# Altium PCB 8586S1.PcbDoc (part 1 of 2)
Units mm, origin at the board's own origin, x right, y up, seen from the top; angles counter-clockwise.
Board outline 80 x 108 mm, 2 copper layers (Top Layer, Bottom Layer); 127 components, 88 nets, 363 pads, 92 vias.
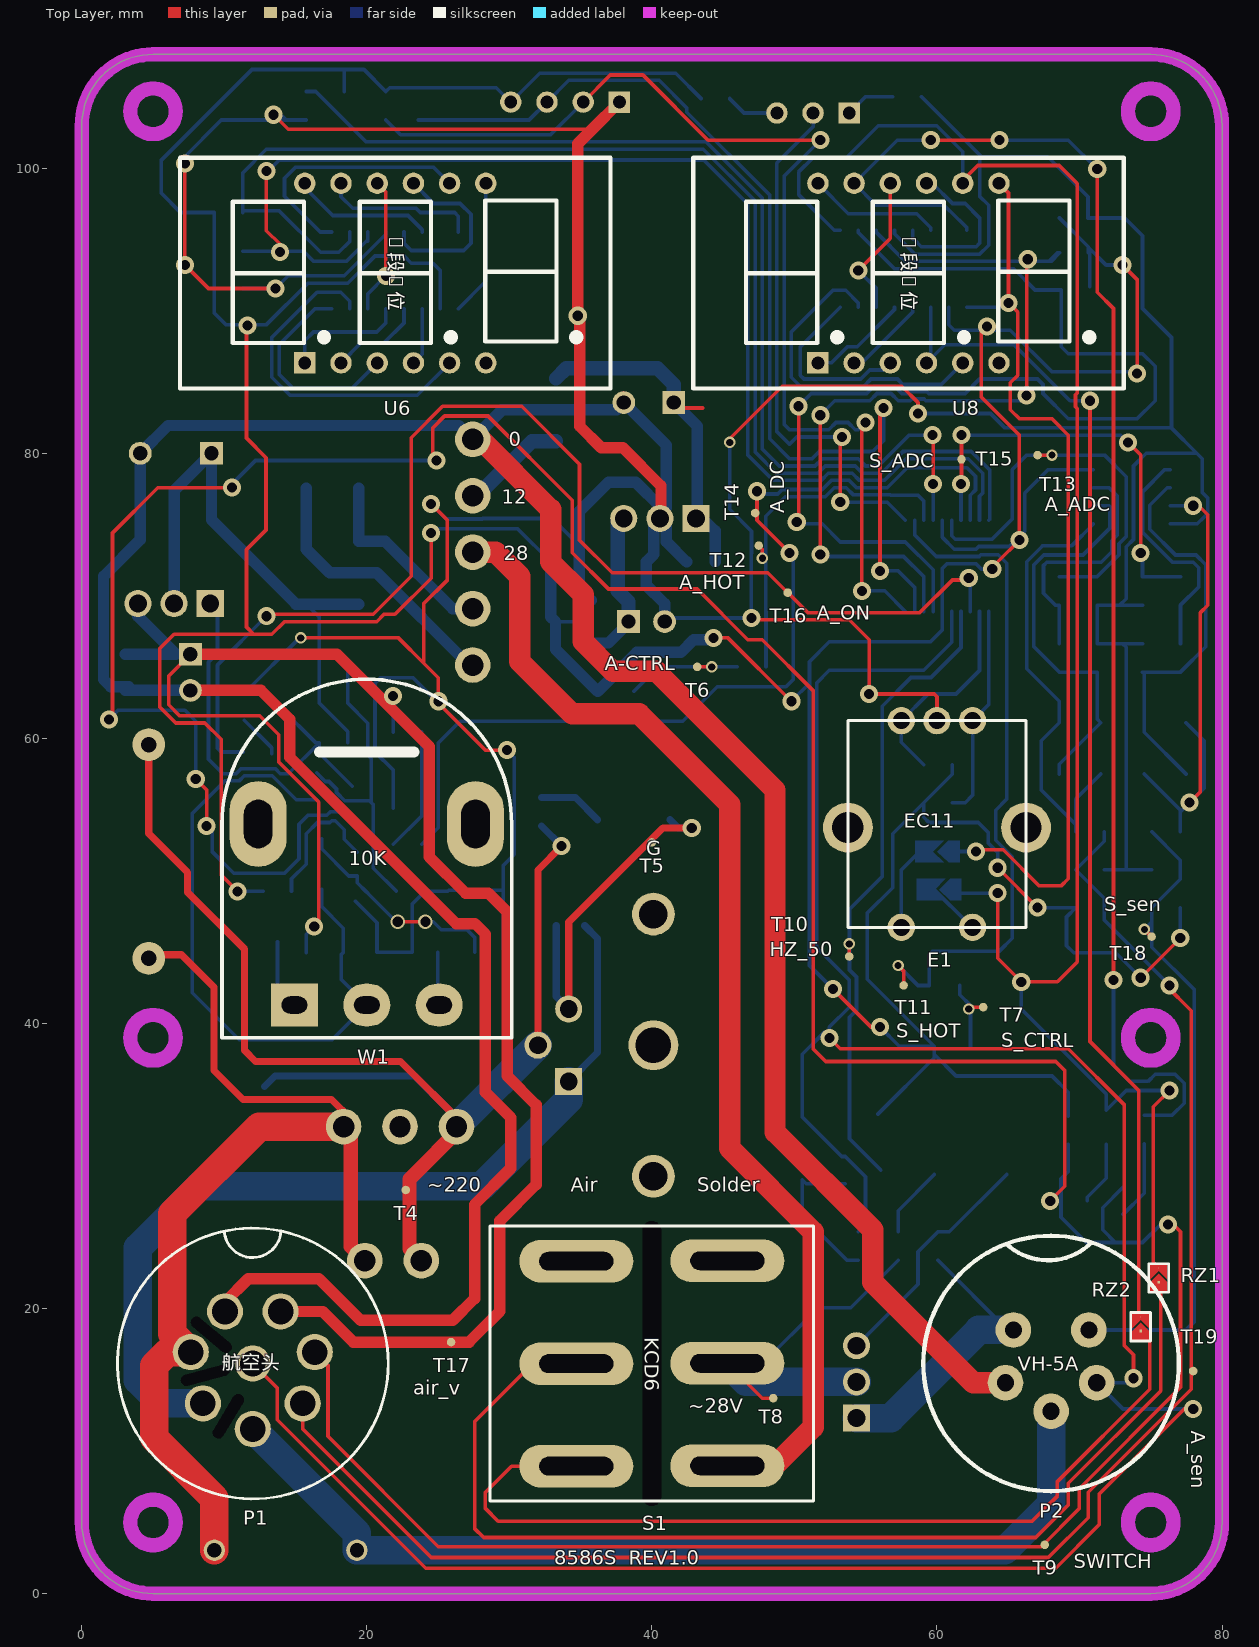
[diagram p0: Top Layer view]
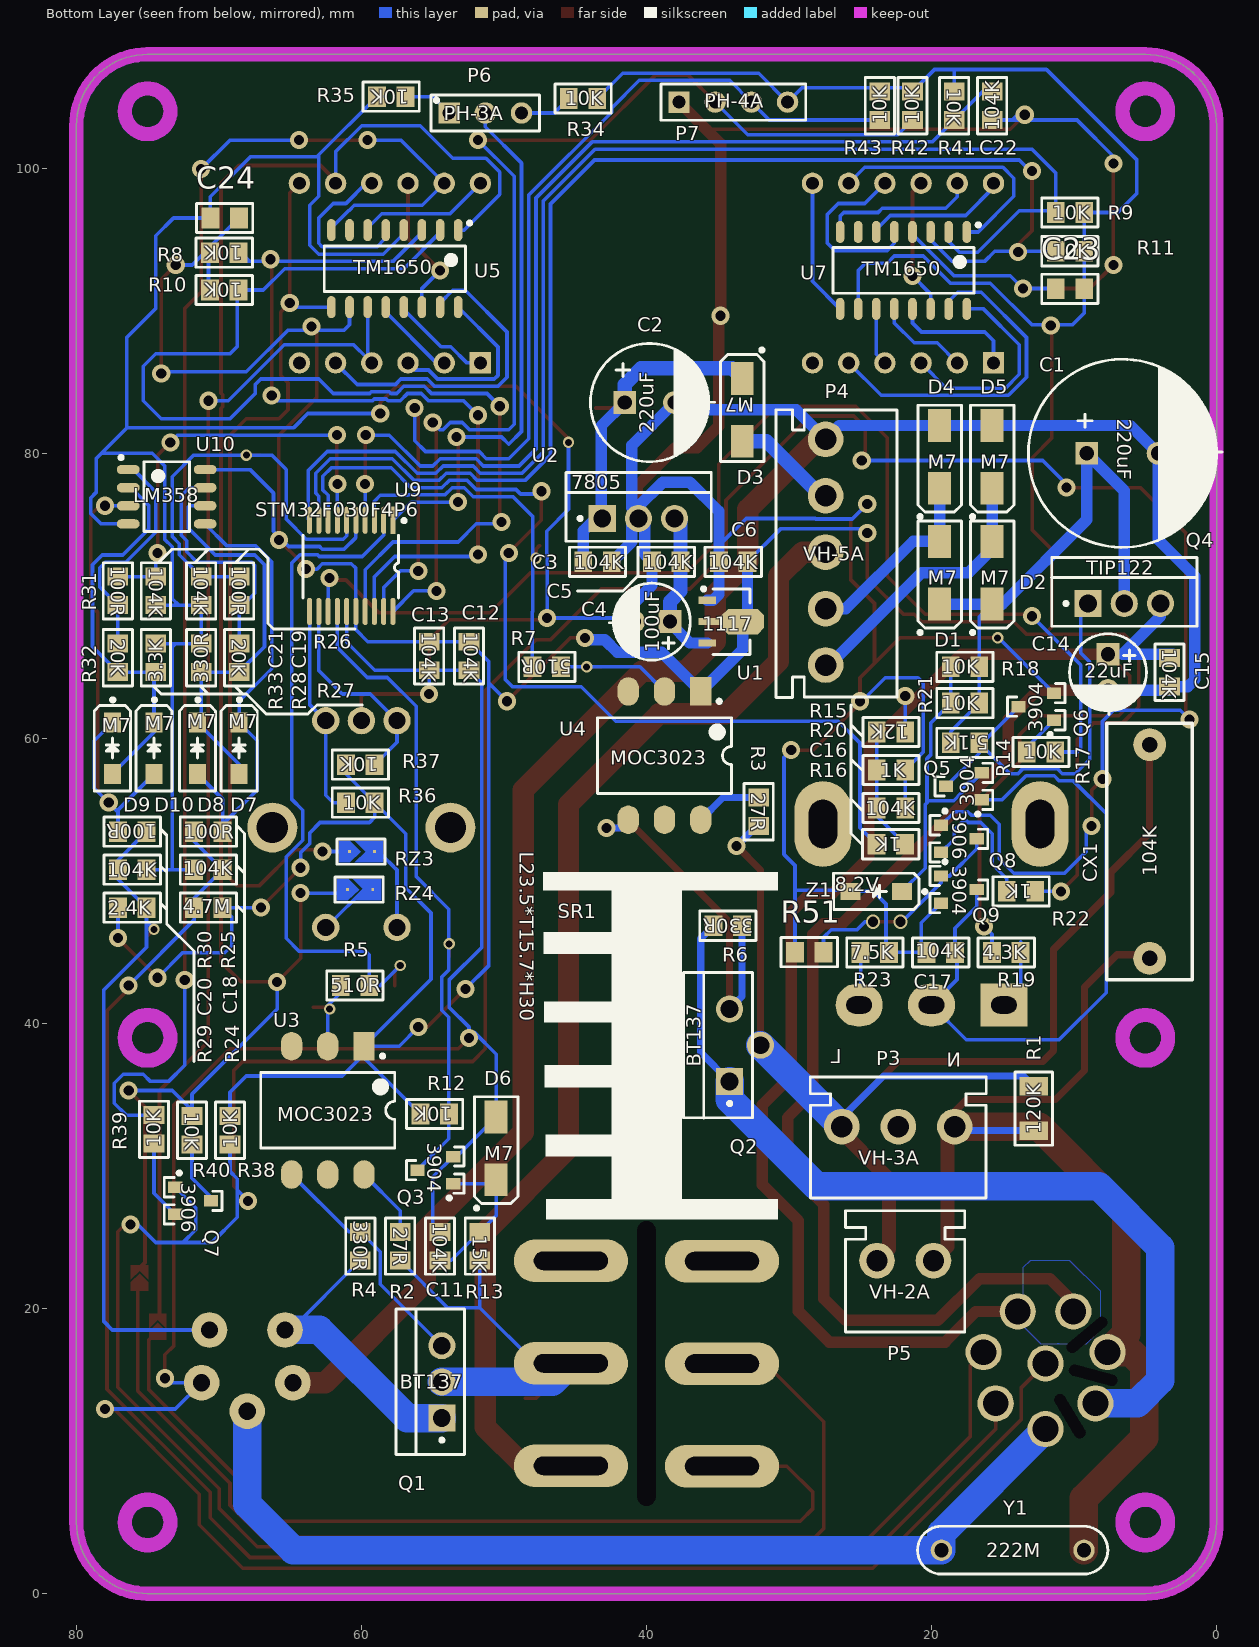
[diagram p1: Bottom Layer view, seen from below]
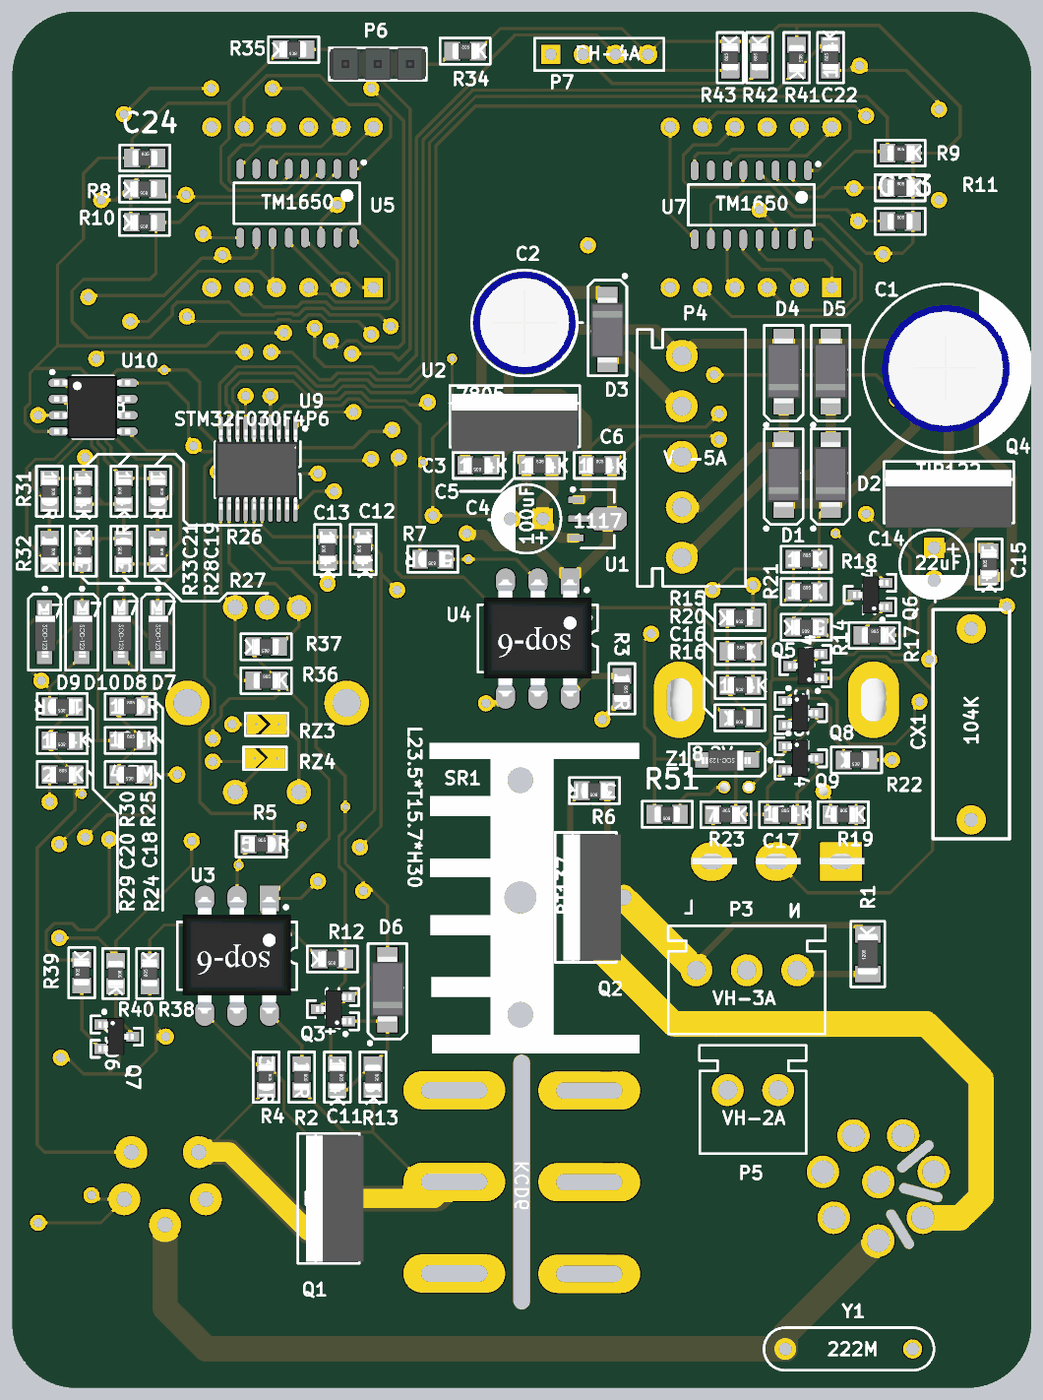
[diagram p3: 3D render of the assembled board from below, using the file's embedded part models]

## Layer stack, top to bottom
Top Solder: solder mask 0.0102, Solder Resist, Dk 3.5
Top Layer: signal copper 0.0356
Dielectric 1: dielectric 0.32, FR-4, Dk 4.8
Bottom Layer: signal copper 0.0356
Bottom Solder: solder mask 0.0102, Solder Resist, Dk 3.5

## Board outline
0,5 0,103 cw(c5,103) 5,108 75,108 cw(c75,103) 80,103 80,5 cw(c75,5) 75,0 5,0 cw(c5,5)

## Design rules (kind name [scope] priority, off if disabled: settings)
Clearance Clearance_1 [All] p1: gap=0.254
Clearance Plon [InPolygon] p2: gap=1
HoleSize [All] p1: absolutevalues=TRUE maxlimit=30 minlimit=0.025 maxpercent=80.000 minpercent=20.000
PolygonConnect [All] p1: connectstyle=Relief reliefconductorwidth=0.254 reliefentries=4 polygonreliefangle="90 Angle" airgapwidth=0.254
RoutingVias [All] p1: holewidth=0.711 width=0.8 viastyle="Through Hole" minholewidth=0.2 minwidth=0.2 maxholewidth=0.711 maxwidth=2
SolderMaskExpansion [All] p1: expansion=0.102
Width Width_1 [All] p1: maxlimit=2 minlimit=0.254 preferedwidth=0.254
29 further rules are at their usual default settings.

## Components (designator, comment, footprint, x,y, rotation, side; value= is the part's Value field where it differs from the comment)
C1 "220uF" P5D13H27 6.604,80.01 r180 bottom
C2 "220uF" P3.5D8H13 41.529,83.566 r180 bottom
C3 "104K" 0805 43.434,72.39 r0 bottom
C4 "100uF" P2.54D5H11 38.354,68.199 r0 bottom
C5 "104K" 0805 38.608,72.39 r180 bottom
C6 "104K" 0805 33.909,72.39 r180 bottom
C11 "104K" 0805 54.483,24.384 r270 bottom
C12 "104K" 0805 52.451,65.786 r90 bottom
C13 "104K" 0805 55.245,65.786 r90 bottom
C14 "22uF" P2.54D5H11 7.62,65.913 r270 bottom
C15 "104K" 0805 3.302,64.643 r90 bottom
C16 "104K" 0805 22.844,55.118 r0 bottom
C17 "104K" 0805 19.355,44.983 r180 bottom
C18 "104K" 0805 70.739,50.8 r180 bottom
C19 "104K" 0805 71.247,70.358 r90 bottom
C20 "104K" 0805 76.073,50.8 r0 bottom
C21 "104K" 0805 74.422,70.358 r90 bottom
C22 "104K" 0805 15.748,104.394 r90 bottom
C23 "10uF" 0805 10.287,91.542 r180 bottom
C24 "10uF" 0805 69.596,96.52 r180 bottom
CX1 "104K" 方形P15T6L18H12 4.699,52.07 r90 bottom
D1 "M7" SMA 19.431,71.628 r90 bottom
D2 "M7" SMA 15.748,71.628 r90 bottom
D3 "M7" SMA 33.274,83.058 r270 bottom
D4 "M7" SMA 19.431,79.756 r90 bottom
D5 "M7" SMA 15.748,79.756 r90 bottom
D6 "M7" SMA 50.546,31.242 r90 bottom
D7 "M7" SOD123 68.58,59.309 r90 bottom
D8 "M7" SOD123 71.501,59.309 r90 bottom
D9 "M7" SOD123 77.47,59.309 r90 bottom
D10 "M7" SOD123 74.549,59.309 r90 bottom
E1 "EC11" EC11 60,54 r180 top locked
P1 "航空头" 航空头8PIN 12,16.15 r0 top locked
P2 "VH-5A" 航空头5PIN 68.008,16.15 r0 top locked
P3 "VH-3A" CON3-P3.96 26.289,32.766 r270 bottom
P4 "VH-5A" CON5-P3.96 27.432,65.151 r180 bottom
P5 "VH-2A" CON2-P3.96 21.844,23.368 r270 bottom
P6 "PH-3A" CON3-P2.54 53.848,103.886 r180 bottom
P7 "PH-4A" CON4-P2.54 37.719,104.648 r180 bottom
Q1 "BT137" TO-220-3L-P2.54#1 54.356,14.859 r90 bottom
Q2 "BT137" TO-220-3L-P2.54#2 34.163,38.481 r90 bottom
Q3 "3904" SOT-23-3L 54.864,29.718 r90 bottom
Q4 "TIP122" TO-220-3L-P2.54#1 6.477,69.469 r180 bottom
Q5 "3904" SOT-23-3L 17.78,56.642 r90 bottom
Q6 "3904" SOT-23-3L 12.7,62.23 r90 bottom
Q7 "3906" SOT-23-3L 71.755,27.559 r270 bottom
Q8 "3906" SOT-23-3L 18.034,52.959 r270 bottom
Q9 "3904" SOT-23-3L 18.034,49.403 r270 bottom
R1 "120K" 1206 12.827,34.036 r90 bottom
R2 "27R" 0805 57.277,24.384 r270 bottom
R3 "27R" 0805 32.131,54.864 r270 bottom
R4 "330R" 0805 60.071,24.384 r270 bottom
R5 "510R" 0805 60.452,42.672 r180 bottom
R6 "330R" 0805 34.29,46.863 r0 bottom
R7 "510R" 0805 46.99,65.024 r0 bottom
R8 "10K" 0805 69.621,94.082 r0 bottom
R9 "10K" 0805 10.287,96.901 r180 bottom
R10 "10K" 0805 69.621,91.465 r0 bottom
R11 "10K" 0805 10.287,94.183 r180 bottom
R12 "10K" 0805 54.864,33.655 r0 bottom
R13 "15K" 0805 51.689,24.384 r270 bottom
R14 "5.1K" 0805 17.653,59.69 r0 bottom
R15 "12K" 0805 22.844,60.452 r0 bottom
R16 "1K" 0805 22.86,52.578 r0 bottom
R17 "10K" 0805 12.319,59.055 r180 bottom
R18 "10K" 0805 17.653,65.024 r180 bottom
R19 "4.3K" 0805 14.757,44.983 r180 bottom
R20 "1K" 0805 22.844,57.785 r180 bottom
R21 "10K" 0805 17.653,62.484 r180 bottom
R22 "1K" 0805 13.716,49.276 r0 bottom
R23 "7.5K" 0805 23.978,44.983 r180 bottom
R24 "4.7M" 0805 70.739,48.133 r0 bottom
R25 "100R" 0805 70.739,53.467 r180 bottom
R26 "100R" 0805 68.58,70.358 r270 bottom
R27 "20K" 0805 68.58,65.659 r270 bottom
R28 "330R" 0805 71.247,65.659 r90 bottom
R29 "2.4K" 0805 76.073,48.133 r180 bottom
R30 "100R" 0805 76.073,53.467 r0 bottom
R31 "100R" 0805 77.089,70.358 r270 bottom
R32 "20K" 0805 77.089,65.659 r270 bottom
R33 "3.3K" 0805 74.422,65.659 r90 bottom
R34 "10K" 0805 44.45,104.902 r180 bottom
R35 "10K" 0805 57.912,105.029 r0 bottom
R36 "10K" 0805 60.071,55.499 r180 bottom
R37 "10K" 0805 60.071,58.166 r0 bottom
R38 "10K" 0805 69.215,32.512 r90 bottom
R39 "10K" 0805 74.549,32.578 r90 bottom
R40 "10K" 0805 71.882,32.512 r270 bottom
R41 "10K" 0805 18.415,104.394 r270 bottom
R42 "10K" 0805 21.336,104.394 r90 bottom
R43 "10K" 0805 23.622,104.394 r90 bottom
R51 "10K" 0805 28.575,45.009 r0 bottom
RZ1 "" 跳线-小 75.565,22.352 r90 top
RZ2 "" 跳线-小 74.295,18.923 r90 top
RZ3 "" 跳线2012 59.944,52.07 r180 bottom
RZ4 "" 跳线2012 60.071,49.403 r180 bottom
S1 "KCD6" "开关-船式 - 双" 39.999,16.15 r0 top locked
SR1 "L23.5*T15.7*H30" 散热片L23.5*T15.7*H30 38.608,38.481 r90 bottom
T4 "~220" test_dot_6 22.733,28.321 r0 top
T5 "G" test_dot_6 40.005,52.705 r0 top
T6 "A-CTRL" test_dot_6 43.18,65.024 r0 top
T7 "S_CTRL" test_dot_6 63.246,41.148 r0 top
T8 "~28V" test_dot_6 48.514,13.716 r0 top
T9 "SWITCH" test_dot_6 67.564,3.429 r0 top
T10 "HZ_50" test_dot_6 53.848,44.704 r90 top
T11 "S_HOT" test_dot_6 57.658,42.672 r90 top
T12 "A_HOT" test_dot_6 47.498,73.533 r90 top
T13 "A_ADC" test_dot_6 67.056,79.883 r90 top
T14 "A_DC" test_dot_6 47.244,75.819 r90 top
T15 "S_ADC" test_dot_6 61.722,79.584 r90 top
T16 "A_ON" test_dot_6 49.53,70.231 r90 top
T17 "air_v" test_dot_6 25.908,17.653 r90 top
T18 "S_sen" test_dot_6 75.057,46.101 r90 top
T19 "A_sen" test_dot_6 77.978,15.621 r90 top
U1 "1117" SOT89L 34.036,68.199 r180 bottom
U2 "7805" TO-220-3L-P2.54#3 43.104,75.438 r180 bottom
U3 "MOC3023" SOP-6 62.357,33.909 r270 bottom
U4 "MOC3023" SOP-6 38.735,58.801 r270 bottom
U5 "TM1650" SOIC16_39MM 57.658,92.964 r270 bottom
U6 "8段3位" 数码管 22,92.65 r0 top locked
U7 "TM1650" SOIC16_39MM 21.971,92.837 r270 bottom
U8 "8段3位" 数码管 58,92.65 r0 top locked
U9 "STM32F030F4P6" TSSOP20引脚加长 57.785,75.311 r270 bottom
U10 "LM358" SOIC8_39MM 73.66,76.962 r180 bottom
W1 "10K" R16P5.083PIN 20,54 r0 top locked
Y1 "222M" 椭圆T3.3P10 19.304,3.048 r180 bottom
Z1 "8.2V" SOD123 23.876,49.276 r180 bottom

## Footprints (in the part's own frame and the unit in brackets; to place one, negate y for a bottom-side part, rotate by r counter-clockwise, add the part's x,y. Pads: shape width x height; smd on the part's side, far side on the other; paste and mask are expansions set on the pad)
0805 [mm] "Chip Resistor, Body 2.0x1.2mm, IPC Low Density"
  rect 1.25x1.45 smd: 1(-1,0) 2(1,0)
  silkscreen extent -1.97,-1.02 1.97,1.02, body extent -1,-0.63 1,0.63, height 0.78
1206 [mm] "Chip Resistor, Body 3.1x1.6mm, IPC High Density"
  rect 1.3x2 smd: 1(-1.55,0) 2(1.55,0)
  silkscreen extent -2.58,-1.33 2.58,1.33, body extent -1.6,-0.8 1.6,0.8, height 1
CON2-P3.96 [mm]
  round 2.5 hole 1.5: 1(0,-1.98) 2(0,1.98)
  silkscreen extent -3.5,-4.19 5,4.18
CON3-P2.54 [mm] "Connector; Header; 3 Position"
  rect 1.5x1.5 hole 0.9: 1(0,0)
  round 1.5 hole 0.9: 2(2.54,0) 3(5.08,0)
  silkscreen extent -1.27,-1.27 6.35,1.27, body extent -1.27,-1.27 6.35,1.27, height 9.5
CON3-P3.96 [mm]
  round 2.5 hole 1.5: 1(0,0) 2(0,3.96) 3(0,7.92)
  silkscreen extent -3.49,-2.21 5,10.13
CON4-P2.54 [mm] "Connector; Header; 4 Position"
  rect 1.5x1.5 hole 0.9: 1(0,0)
  round 1.5 hole 0.9: 2(2.54,0) 3(5.08,0) 4(7.62,0)
  silkscreen extent -1.27,-1.27 8.89,1.27
CON5-P3.96 [mm]
  round 2.5 hole 1.5: 1(0,0) 2(0,3.96) 3(0,7.92) 4(0,11.88) 5(0,15.84)
  silkscreen extent -3.49,-2.27 5,17.91
EC11 [mm]
  round 1.92 hole 1.2: 1(-2.5,-7.25) 2(2.5,-7.25) 3(0,-7.25) 4(-2.5,7.25) 5(2.5,7.25)
  round 3.5 hole 2.2: ""(-6.25,0.25) ""(6.25,0.25)
  silkscreen extent -6.25,-7.25 6.25,7.25
P2.54D5H11 [mm] "居中；引脚间距2.54直径5.4"
  rect 1.6x1.6 hole 1: 1(0,0)
  round 1.6 hole 1: 2(2.54,0)
  silkscreen extent -1.43,-2.7 4.24,2.7
P3.5D8H13 [mm]
  rect 1.6x1.6 hole 1: 1(0,0)
  round 1.6 hole 1: 2(3.5,0)
  silkscreen extent -2.4,-4.15 6.31,4.15, body extent -2.28,-4 5.77,4.05, height 12.03
P5D13H27 [mm]
  rect 1.6x1.6 hole 1: 1(-2.5,0)
  round 1.6 hole 1: 2(2.5,0)
  silkscreen extent -6.6,-6.6 6.98,6.6, body extent -5.13,-5.05 4.92,5, height 13.03
R16P5.083PIN [mm]
  rect 3.3x3 hole 1.2 slot 1.8 at 0 deg: 1(-5.08,-12.7)
  oval 3.3x3 hole 1.2 slot 1.8 at 0 deg: 2(0,-12.7) 3(5.08,-12.7)
  oval 4x6 hole 2 slot 3.4 at 90 deg: ""(-7.62,0) ""(7.62,0)
  silkscreen extent -10.16,-14.99 10.16,10.16, body extent -8.65,-12.92 8.35,8.55, height 32.7
SMA [mm]
  rect 2.3x1.6 smd: 1(-2.2,0) 2(2.2,0)
  silkscreen extent -4.32,-1.52 3.63,1.52, body extent -2.55,-1.3 2.65,1.3, height 2.5
SOD123 [mm]
  rect 1.4x1.2 smd: 1(1.8,0) 2(-1.8,0)
  silkscreen extent -3,-1.27 3.53,1.27, body extent -2,-0.9 1.85,0.8, height 1.42
SOIC8_39MM [mm]
  oval 1.6x0.65 smd: 1(-2.7,1.905) 2(-2.7,0.635) 3(-2.7,-0.635) 4(-2.7,-1.905) 5(2.7,-1.905) 6(2.7,-0.635) 7(2.7,0.635) 8(2.7,1.905)
  silkscreen extent -3.33,-2.45 1.6,2.87, body extent -3.08,-2.45 2.92,2.45, height 1.75
SOIC16_39MM [mm]
  oval 1.55x0.6 smd: 1(-2.7,4.445) 2(-2.7,3.175) 3(-2.7,1.905) 4(-2.7,0.635) 5(-2.7,-0.635) 6(-2.7,-1.905) 7(-2.7,-3.175) 8(-2.7,-4.445) 9(2.7,-4.445) 10(2.7,-3.175) 11(2.7,-1.905) 12(2.7,-0.635) 13(2.7,0.635) 14(2.7,1.905) 15(2.7,3.175) 16(2.7,4.445)
  silkscreen extent -3.32,-4.95 1.6,5.37
SOP-6 [mm] "6 Leads; Row Spacing 7.62 mm; Pitch 2.54 mm"
  rect 2x1.5 smd: 1(-4.5,2.54)
  oval 2x1.5 smd: 2(-4.5,0) 3(-4.5,-2.54) 4(4.5,-2.54) 5(4.5,0) 6(4.5,2.54)
  silkscreen extent -3.93,-4.7 2.65,4.7, body extent -4.63,-4.27 4.53,4.24, height 4
SOT89L [mm] "SOT89, 3-Leads, Body 4.5x2.4 mm, Pitch 1.5mm, Lead Span 4.1mm, IPC High Density"
  rect 1.2x0.5 smd: 1(-1.7,1.5) 3(-1.7,-1.5)
  rect 1.6x0.5 smd: 2(-1.5,0)
  oct 3x1.8 smd: 2(0.8,0)
  silkscreen extent -2.08,-2.3 1.3,2.42, body extent -1.3,-2.3 1.3,2.3, height 1.6
SOT-23-3L [mm]
  rect 0.8x1 smd: 1(-0.95,-1.3) 2(0.95,-1.3) 3(0,1.2)
  silkscreen extent -2.07,-2.07 1.63,1.97, body extent -1.45,-1.5 1.45,1.3, height 1.3
test_dot_6 [mm] "0.6mm"
  round 0.6 smd: 1(0,0)
TO-220-3L-P2.54#1 [mm] "use:MOS TUBE"
  rect 1.9x1.9 hole 1.25: 1(-2.54,0)
  round 1.9 hole 1.25: 2(0,0) 3(2.54,0)
  silkscreen extent -5.1,-1.6 5.11,3.23, body extent -4.95,-1.93 4.95,2.57, height 17.8
TO-220-3L-P2.54#2 [mm] "use:MOS TUBE"
  rect 1.9x1.9 hole 1.25: 1(-2.54,0)
  round 1.9 hole 1.25: 2(0,-2.163) 3(2.54,0)
  silkscreen extent -5.1,-1.6 5.11,3.23, body extent -4.95,-1.93 4.95,2.57, height 17.8
TO-220-3L-P2.54#3 [mm] "use:MOS TUBE"
  rect 1.9x1.9 hole 1.25: 1(0,0)
  round 1.9 hole 1.25: 2(2.54,0) 3(5.08,0)
  silkscreen extent -2.56,-1.6 7.65,3.23, body extent -2.41,-1.93 7.49,2.57, height 17.8
TSSOP20引脚加长 [mm] "20-pin, 4.40 mm body, 0.65 mm pitch"
  rect 1.9x0.356 smd: 1(0,0)
  oval 1.9x0.356 smd: 2(0,-0.65) 3(0,-1.3) 4(0,-1.95) 5(0,-2.6) 6(0,-3.25) 7(0,-3.9) 8(0,-4.55) 9(0,-5.2) 10(0,-5.85) 11(6.4,-5.85) 12(6.4,-5.2) 13(6.4,-4.55) 14(6.4,-3.9) 15(6.4,-3.25) 16(6.4,-2.6) 17(6.4,-1.95) 18(6.4,-1.3) 19(6.4,-0.65) 20(6.4,0)
  silkscreen extent -0.1,-6.3 5.45,0.9, body extent 0.1,-6.25 6.38,0.25, height 1.09
"开关-船式 - 双" [mm] "KCD1"
  oval 8x3 hole 1.3 slot 5.2 at 0 deg unplated: 1(-5.3,7.177) 2(-5.3,-0.013) 3(-5.3,-7.203) 4(5.3,7.203) 5(5.3,0.013) 6(5.3,-7.177)
  round 0 hole 1.3 slot 20 at 90 deg: ""(0,0)
  silkscreen extent -11.35,-9.65 11.35,9.65
散热片L23.5*T15.7*H30 [mm]
  round 3 hole 2: ""(-9.2,1.5) ""(9.2,1.5)
  round 3.5 hole 2.5: ""(0,1.5)
  silkscreen extent -12.22,-7.85 12.14,8.64
数码管 [mm] "Connector; Header; 6 Position"
  rect 1.5x1.5 hole 0.9: 1(-6.35,-6.3)
  round 1.5 hole 0.9: 2(-3.81,-6.3) 3(-1.27,-6.3) 4(1.27,-6.3) 5(3.81,-6.3) 6(6.35,-6.3) 7(6.35,6.3) 8(3.81,6.3) 9(1.27,6.3) 10(-1.27,6.3) 11(-3.81,6.3) 12(-6.35,6.3)
  silkscreen extent -15.1,-8.1 15.1,8.1
方形P15T6L18H12 [mm] "P引脚间距L长W宽H高"
  round 2.3 hole 1.1: 1(-7.5,0) 2(7.5,0)
  silkscreen extent -8.99,-3 9.01,3
椭圆T3.3P10 [mm]
  round 1.5 hole 1: 1(0,0) 2(10,0)
  silkscreen extent -1.68,-1.68 11.68,1.68
航空头5PIN [mm]
  round 2.5 hole 1.2: 1(-2.65,2.35) 2(-3.2,-1.35) 3(0,-3.35) 4(3.2,-1.35) 5(2.65,2.35)
  silkscreen extent -8.96,-8.96 8.96,8.96
航空头8PIN [mm]
  round 2.54 hole 1.8: 1(-1.95,3.65) 2(-4.35,0.8) 3(-3.5,-2.8) 4(0,-4.6) 5(3.5,-2.8) 6(4.35,0.8) 7(1.95,3.65) 8(0,0)
  silkscreen extent -9.5,-9.5 9.5,9.5
跳线2012 [mm] "Chip Resistor, Body 2.0x1.2mm, IPC Medium Density"
  rect 0.2x0.2 smd: 1(-0.9,0) 2(0.864,0)
  Top Layer region: -1.649,0.762 -0.864,0.762 -0.092,-0.001 -0.869,-0.762 -1.649,-0.762
  Top Layer region: -0.523,0.762 1.474,0.762 1.473,0.762 1.473,-0.762 -0.523,-0.762 0.239,0
  silkscreen extent -1.78,-0.89 1.6,0.89
跳线-小 [mm] "Chip Resistor, Body 2.0x1.2mm, IPC Medium Density"
  rect 0.2x0.2 smd mask+0.102: 1(-0.5,0)
  rect 0.05x0.05 smd mask+0.02: 2(0.5,0)
  Top Layer region: -1.1,0.6 -0.5,0.6 0.1,0 -0.5,-0.6 -1.1,-0.6
  Top Layer region: -0.3,0.6 0.7,0.6 0.7,-0.6 -0.3,-0.6 0.3,0
  silkscreen extent -1.2,-0.7 0.8,0.7

## Part data
C1 C2 C4 C14: library part "Cap Pol", "极性电容"
C3 C5 C6 C11 C12 C13 C15 C16 C17 C18 C19 C20 C21 C22 C23 C24: library part Cap, "电容"
CX1 Y1: library part Cap, "安规电容"
D1 D2 D3 D4 D5 D6 D7 D8 D9 D10: library part Diode, "二极管"
E1: library part EC11_S, "旋转编码器"
P1: library part "Header 8", "连接器"
P2 P4: library part "Header 5", "连接器"
P3 P6: library part "Header 3", "连接器"
P5: library part "Header 2", "连接器"
P7: library part "Header 4", "连接器"
Q1 Q2: library part Triac, "可控硅"
Q3 Q5 Q6 Q9: library part "transistor NPN", "三极管"
Q4: "NPN"
Q7 Q8: library part "transistor PNP", "三极管"
R1 R2 R3 R4 R5 R6 R7 R8 R9 R10 R11 R12 R13 R14 R15 R16 R17 R18 R19 R20 R21 R22 R23 R24 R25 R26 R27 R28 R29 R30 R31 R32 R33 R34 R35 R36 R37 R38 R39 R40 R41 R42 R43 R51: library part Res1, "电阻"
RZ1 RZ2 RZ3 RZ4: library part Res0, "电阻"
S1: library part 开关2-3, "Double-Pole, Double-Throw Switch"
SR1: library part 散热片
T4 T5 T6 T7 T8 T9 T10 T11 T12 T13 T14 T15 T16 T17 T18 T19: library part Test_dot, "测试点"
U1 U2: "三端稳压器"
U5 U7: "数码管驱动IC"
U6 U8: library part 数码管, "数码管"
U9: library part STM32F030F4
U10: "运放"
W1: library part "Res Adj", "可调电阻"
Z1: library part "diode Zener", "稳压管"

## Free pads (board coordinates)
  round 0 hole 0.8 slot 3.5 at 59 deg: 2(10.287,12.446)
  round 0 hole 0.8 slot 3.5 at 140 deg: 3(9.093,18.161)
  round 0 hole 0.8 slot 3.5 at 15 deg: 4(8.661,15.316)

## Via types
v1: diameter 1.27, hole 0.711, Top Layer to Bottom Layer, 81 vias
v2: diameter 0.8, hole 0.5, Top Layer to Bottom Layer, 9 vias
v3: diameter 1, hole 0.711, Top Layer to Bottom Layer, 2 vias

## Nets (pads, with @x,y where several pads share a name; then routed paths per layer and width w, separated by ;. In a path a pad name is that pad's centre, name@x,y a point inside that pad or via, vN(x,y) a via of type N, cw(c..) or ccw(c..) an arc to the next point about the centre after c; other vN are vias at no path point)
+3.3V: C6.2 C12.2 C13.2 C23.2 C24.2 P7.4 R8.2 R9.2 R10.2 R11.2 R12.2 R22.1 R24.1 R29.1 R34.2 R36.2 R37.2 R38.2 R41.1 R42.2 R43.2 U1.2 U3.1 U4.1 U5.10 U7.10 U9.5 U9.16 U10.8 | length 381.5
  Top Layer w0.254: v1(10.922,49.276) 9.779,50.419 9.779,59.944 8.636,61.087 6.604,61.087 5.461,62.23 5.461,66.294 6.477,67.31 12.065,67.31 ; v1(11.633,88.963) 11.557,88.887 11.557,81.077 12.929,79.705 12.929,74.625 11.557,73.254 11.557,67.818 12.065,67.31 ; v1(24.511,74.422) 24.511,71.247 21.971,68.707 21.209,68.707 20.701,68.199 14.224,68.199 13.335,67.31 12.065,67.31 ; v1(44.323,67.056) 45.339,67.056 v1(49.784,62.611) ; v1(52.705,42.418) 55.372,39.751 v1(56.007,39.751) ; v1(63.5,88.9) 63.119,88.519 63.119,83.947 65.786,81.28 v1(65.786,73.914) 64.262,72.39 ; v1(64.262,50.927) v1(67.056,48.133) ; v1(73.025,93.218) 74.041,92.202 v1(74.041,85.598) ; v1(74.295,43.212) v1(77.073,45.99)
  Bottom Layer w0.254: v1(10.922,49.276) R22.1@12.716,49.276 ; v1(11.633,88.963) v1@11.557,89.04 ; R41.1@18.415,105.394 18.415,106.934 ; v1(24.511,74.422) 24.791,74.702 30.597,74.702 C6.2@32.909,72.39 ; U7.10@25.146,90.137 25.146,92.837 24.638,93.345 23.114,93.345 22.606,93.853 20.574,93.853 18.669,91.948 15.875,91.948 12.967,89.04 v1@11.557,89.04 ; U1.2@33.236,68.199 U1.2@35.536,68.199 ; R34.2@43.45,104.902 41.672,106.68 32.131,106.68 P7.4@30.099,104.648 29.083,105.664 21.606,105.664 R42.2@21.336,105.394 19.796,106.934 18.415,106.934 ; v1(49.784,62.611) 51.054,63.881 ; v1(52.705,42.418) 51.054,44.069 51.054,63.881 ; R12.2@55.864,33.655 59.817,37.608 U3.1@59.817,37.846 ; v1(56.007,39.751) 57.349,38.409 U3.1@59.817,38.409 ; U9.5@60.385,75.311 60.385,74.108 61.214,73.279 62.742,73.279 62.935,73.472 65.09,73.472 66.167,74.549 66.167,77.216 67.818,78.867 U10.8@70.96,78.867 ; U5.10@60.833,90.264 60.833,89.027 61.214,88.646 65.151,88.646 68.072,85.725 73.914,85.725 v1(74.041,85.598) ; R37.2@61.071,58.166 61.071,57.499 R36.2@59.071,55.499 ; v1(63.881,71.882) 63.119,71.882 62.738,72.263 60.706,72.263 60.385,71.942 U9.16@60.385,68.911 60.385,67.624 59.547,66.786 C13.2@55.245,66.786 C12.2@52.451,66.786 51.054,65.389 51.054,63.881 ; v1(64.262,50.927) 64.262,52.006 63.611,52.657 63.611,53.396 62.905,54.102 59.436,54.102 59.071,54.467 R36.2@59.071,55.499 ; v1(67.056,48.133) R24.1@69.739,48.133 69.088,47.482 69.088,45.466 69.596,44.958 72.549,44.958 v1(74.295,43.212) ; C24.2@68.596,96.52 70.621,94.495 R8.2@70.621,94.082 ; R38.2@69.215,33.512 69.215,35.179 68.072,36.322 61.341,36.322 U3.1@59.817,37.846 ; R10.2@70.723,91.694 70.723,94.361 71.866,93.218 v1(73.025,93.218) ; v1(77.073,45.99) R29.1@77.073,48.133 ; v1@11.557,89.04 10.096,89.04 9.287,89.849 C23.2@9.287,91.542 R11.2@9.287,94.183 R9.2@9.287,96.901 6.934,96.901 5.588,98.247 5.588,100.584 11.938,106.934 18.415,106.934 ; R36.2@59.071,55.499 56.896,53.324 56.896,49.53 55.118,47.752 55.118,43.108 U3.1@59.817,38.409 ; U3.1@59.817,37.846 U3.1@59.817,38.409
  Bottom Layer w0.8: C6.2@32.909,72.39 32.909,68.526 U1.2@33.236,68.199 33.236,66.26 U4.1@36.195,63.301 38.934,66.04 42.037,66.04 42.926,66.929 44.196,66.929 v1(44.323,67.056)
+5V: C4.1 C5.2 U1.3 U2.3 | length 11.4
  Bottom Layer w0.8: U1.3@35.736,66.699 36.957,66.699 38.354,68.096 C4.1@38.354,68.199
  Bottom Layer w1: U2.3@38.1,75.819 37.608,75.327 C5.2@37.608,72.39 37.608,70.342 38.354,69.596 C4.1@38.354,68.199
+12V: C2.1 C3.2 D3.1 U2.1 | length 24.9
  Top Layer w0.254: C2.1@41.529,83.566 41.91,83.185 43.561,83.185
  Bottom Layer w0.8: C2.1@41.529,83.566 43.18,81.915 43.18,75.819 44.434,74.565 C3.2@44.434,72.39
  Bottom Layer w1: D3.1@33.274,85.258 33.995,85.979 40.386,85.979 41.529,84.836 C2.1@41.529,83.566
+26V: C1.1 D1.1 D2.1 Q4.2 R14.2 R18.2 R21.2 | length 40
  Bottom Layer w0.254: D2.1@15.748,69.428 16.653,68.523 R18.2@16.653,65.024 R21.2@16.653,62.484 18.653,60.484 R14.2@18.653,59.69
  Bottom Layer w0.8: Q4.2@6.477,69.469 6.477,77.383 C1.1@9.104,80.01 9.104,75.351 15.027,69.428 D2.1@15.748,69.428 D1.1@19.431,69.428
A1: U6.11 U7.8 | length 10.8
  Bottom Layer w0.254: U6.11@18.19,98.95 18.19,98.015 19.004,97.201 23.449,97.201 23.749,96.901 26.162,96.901 26.416,96.647 U7.8@26.416,95.537
A2: R39.2 U5.8 U8.11 | length 102.3
  Top Layer w0.254: v1(59.563,101.981) v1(64.389,101.981) ; v1(71.247,99.949) 71.247,91.313 72.39,90.17 v1(72.39,43.053)
  Bottom Layer w0.254: v1(59.563,101.981) 57.221,101.981 U8.11@54.19,98.95 55.731,97.409 60.496,97.409 60.877,97.028 60.907,97.028 62.103,95.832 U5.8@62.103,95.664 ; v1(64.389,101.981) 69.215,101.981 v1(71.247,99.949) ; v1(72.39,43.053) 72.39,37.084 73.533,35.941 74.803,35.941 75.311,36.449 76.708,36.449 77.343,35.814 77.343,34.417 76.504,33.578 R39.2@74.549,33.578
AIR_DC: R16.2 T14.1 U9.8 | length 69.1
  Top Layer w0.254: v1(47.371,77.343) 47.371,75.311 v1(49.657,73.025)
  Bottom Layer w0.254: R16.2@23.86,52.578 25.019,53.737 25.019,59.69 26.543,61.214 42.164,61.214 44.577,63.627 49.403,63.627 49.911,64.135 49.911,73.279 v1(49.657,73.025) ; v1@47.371,77.153 v1(47.371,77.343) ; v1@47.561,77.153 48.831,77.153 49.149,77.47 51.947,77.47 52.582,78.105 53.844,78.105 54.352,77.597 56.515,77.597 57.912,78.994 62.103,78.994 62.701,78.396 62.701,77.43 62.335,77.064 U9.8@62.335,75.311
AIR_ON_OFF: R17.2 T16.1 U9.13 | length 86.2
  Top Layer w0.254: v1(12.954,68.58) 13.081,68.707 20.447,68.707 23.114,71.374 23.114,81.109 25.317,83.312 30.861,83.312 34.925,79.248 34.925,73.914 37.211,71.628 48.133,71.628 50.927,68.834 58.801,68.834 61.087,71.12 62.23,71.12 v1(62.23,71.247)
  Bottom Layer w0.254: R17.2@11.319,59.055 9.779,59.055 9.525,59.309 9.525,65.151 v1(12.954,68.58) ; v1(62.23,71.247) 62.335,71.142 U9.13@62.335,68.911
AIRHOT: R7.2 T12.1 U9.3 | length 25.2
  Top Layer w0.254: T12.1@47.498,73.533 47.752,73.279 v2(47.752,72.644)
  Bottom Layer w0.254: R7.2@47.99,65.024 48.006,65.04 48.006,68.874 47.99,68.89 47.99,75.593 49.359,76.962 52.157,76.962 52.792,77.597 53.634,77.597 54.142,77.089 56.725,77.089 56.755,77.059 58.674,77.059 59.085,76.648 U9.3@59.085,75.311
B1: U6.7 U7.9 | length 9.6
  Bottom Layer w0.254: U7.9@26.416,90.137 28.35,92.071 U6.7@28.35,98.95
B2: RZ3.1 U5.9 U8.7 | length 65.1
  Top Layer w0.254: v1(62.738,52.07) 62.865,52.197 64.643,52.197 67.183,49.657 68.707,49.657 69.215,50.165 69.215,81.28 68.072,82.423 65.786,82.423 65.151,83.058 65.151,84.963 65.659,85.471 65.659,89.916 v1(65.024,90.551) 65.024,98.276 U8.7@64.35,98.95
  Bottom Layer w0.254: 61.468,52.07 62.103,52.07 62.484,52.451 62.738,52.197 v1(62.738,52.07) ; U5.9@62.103,90.264 64.737,90.264 v1(65.024,90.551)
C1: U6.4 U7.11 | length 4
  Bottom Layer w0.254: U6.4@23.27,86.35 23.876,86.956 U7.11@23.876,90.137
C2: RZ2.2 U5.11 U8.4 | length 82.9
  Top Layer w0.254: v1(70.739,83.693) 70.739,38.735 74.168,35.306 74.168,19.431
  Bottom Layer w0.254: U8.4@59.27,86.35 U8.4@59.563,86.643 ; U5.11@59.563,90.264 U8.4@59.563,86.643 ; v1(70.739,83.693) 69.342,83.693 65.405,87.63 60.55,87.63 U8.4@59.563,86.643
D1: U6.2 U7.12 | length 6.6
  Bottom Layer w0.254: U6.2@18.19,86.35 19.597,87.757 21.209,87.757 22.606,89.154 U7.12@22.606,90.137
D2: U5.12 U8.2 | length 5.9
  Bottom Layer w0.254: U8.2@54.19,86.35 54.727,86.35 58.293,89.916 U5.12@58.293,90.264
DP1: U6.3 U7.16 | length 14.8
  Bottom Layer w0.254: U7.16@17.526,90.137 16.35,90.137 13.843,87.63 13.843,85.554 14.815,84.582 18.962,84.582 U6.3@20.73,86.35
DP2: U5.16 U8.3 | length 12.8
  Bottom Layer w0.254: U5.16@53.213,90.264 50.419,87.47 50.419,85.471 50.671,85.219 54.658,85.219 55.291,85.852 56.232,85.852 U8.3@56.73,86.35
E1: U6.1 U7.13 | length 8.7
  Bottom Layer w0.254: U6.1@15.65,86.35 15.65,87.913 16.256,88.519 20.701,88.519 21.336,89.154 U7.13@21.336,90.137
E2: U5.13 U8.1 | length 7.1
  Bottom Layer w0.254: U8.1@51.65,86.35 52.591,86.35 53.722,87.481 54.408,87.481 57.023,90.096 U5.13@57.023,90.264
EARTH: P1.4 P2.3 Y1.1 | length 68.1
  Bottom Layer w2: P1.4@12,11.55 19.304,4.246 Y1.1@19.304,3.048 64.77,3.048 68.008,6.286 P2.3@68.008,12.8
F1: U6.10 U7.14 | length 9.6
  Top Layer w0.254: U6.10@20.73,98.95 21.336,98.344 v1(21.336,92.456)
  Bottom Layer w0.254: U7.14@20.066,90.137 20.066,91.186 v1(21.336,92.456)
F2: U5.14 U8.10 | length 10.1
  Top Layer w0.254: v1(54.483,92.837) 56.73,95.084 U8.10@56.73,98.95
  Bottom Layer w0.254: v1(54.483,92.837) 55.753,91.567 U5.14@55.753,90.264
FANPOWER: C14.1 C15.2 P1.7 Q4.3 R15.1 R19.1 T17.1 | length 121.7
  Top Layer w0.254: C14.1@7.62,65.913 6.096,64.389 6.096,62.357 6.858,61.595 12.485,61.595 13.824,60.256 13.824,58.351 16.637,55.538 16.637,47.142 v1(16.307,46.812)
  Top Layer w0.8: C14.1@7.62,65.913 17.907,65.913 24.384,59.436 24.384,51.689 26.924,49.149 28.524,49.149 29.845,47.828 29.845,36.322 31.877,34.29 31.877,28.702 29.337,26.162 29.337,19.812 27.178,17.653 19.05,17.653 16.903,19.8 P1.7@13.95,19.8
  Bottom Layer w0.254: R19.1@15.757,44.983 15.757,46.263 v1(16.307,46.812) ; R15.1@21.844,60.452 v1(21.844,62.992)
  Bottom Layer w0.8: C15.2@3.064,65.913 6.604,65.913 3.937,68.58 Q4.3@3.937,69.469
G1: U6.5 U7.15 | length 24.3
  Bottom Layer w0.254: U7.15@18.796,90.137 18.796,90.678 18.161,91.313 16.51,91.313 13.335,88.138 13.335,85.344 14.605,84.074 23.534,84.074 U6.5@25.81,86.35
G2: U5.15 U8.5 | length 23
  Bottom Layer w0.254: U5.15@54.483,90.264 54.483,90.551 53.594,91.44 52.705,91.44 49.784,88.519 49.784,85.344 50.417,84.711 54.869,84.711 55.375,85.217 57.23,85.217 57.611,84.836 60.296,84.836 U8.5@61.81,86.35
GDID1_1: U6.8 U7.1 | length 18
  Bottom Layer w0.254: U7.1@17.526,95.537 16.731,95.537 14.224,98.044 14.224,99.314 14.991,100.081 24.679,100.081 U6.8@25.81,98.95
GDID1_2: R40.1 RZ1.2 RZ4.1 U5.1 U8.8 | length 129.8
  Top Layer w0.254: U8.8@61.81,98.95 61.81,99.148 62.865,100.203 68.58,100.203 69.85,98.933 69.85,84.241 69.723,84.114 69.723,83.272 69.85,83.145 69.85,44.323 68.453,42.926 v1(65.913,42.926) 64.262,44.577 v1(64.262,49.149) ; RZ1.2@75.565,22.852 75.184,23.233 75.184,34.163 v1(76.327,35.306)
  Bottom Layer w0.254: U5.1@53.213,95.664 52.799,95.664 50.292,98.171 50.292,99.739 51.264,100.711 53.594,100.711 55.88,102.997 59.984,102.997 61.81,101.171 U8.8@61.81,98.95 ; 60.833,49.403 61.087,49.149 v1(64.262,49.149) ; v1(65.913,42.926) 65.913,41.021 71.882,35.052 71.882,33.909 73.279,35.306 v1(76.327,35.306)
GDID2_1: U6.9 U7.5 | length 12.9
  Bottom Layer w0.254: U7.5@22.606,95.537 22.606,94.742 23.114,94.234 26.797,94.234 27.305,94.742 27.305,96.774 26.543,97.536 24.684,97.536 U6.9@23.27,98.95
GDID2_2: U5.5 U8.9 | length 12.2
  Bottom Layer w0.254: U5.5@58.293,95.664 58.293,95.016 58.389,95.016 58.897,94.508 62.758,94.508 62.992,94.742 62.992,96.52 61.976,97.536 61.087,97.536 59.673,98.95 U8.9@59.27,98.95
GDID3_1: U6.12 U7.6 | length 9.9
  Bottom Layer w0.254: U6.12@15.65,98.95 15.65,98.65 17.607,96.693 22.888,96.693 23.876,95.705 U7.6@23.876,95.537
GDID3_2: U5.6 U8.12 | length 9.4
  Bottom Layer w0.254: U8.12@51.65,98.95 53.78,96.82 58.575,96.82 59.563,95.832 U5.6@59.563,95.664
GND: CX1.1 P1.2 P3.3 P5.2 R1.1 Y1.2 | length 81.4
  Top Layer w0.5: CX1.1@4.699,44.824 6.992,44.824 9.271,42.545 9.271,36.703 11.303,34.671 17.526,34.671 18.877,33.32 P3.3@18.877,32.766
  Top Layer w1: P3.3@18.877,32.766 18.877,24.355 P5.2@19.864,23.368
  Top Layer w2: Y1.2@9.304,3.048 9.304,6.698 5.08,10.922 5.08,16.002 6.028,16.95 P1.2@7.65,16.95 6.35,18.25 6.35,26.67 12.446,32.766 P3.3@18.369,32.766
  Bottom Layer w0.5: R1.1@12.827,32.486 18.47,32.486 P3.3@18.877,32.893
HZ_50: Q3.3 R12.1 T10.1 U9.14 | length 45.5
  Top Layer w0.254: T10.1@53.848,44.704 v2(53.848,45.593)
  Bottom Layer w0.254: Q3.3@56.064,29.718 53.864,31.918 R12.1@53.864,33.655 53.864,40.446 54.356,40.938 54.356,43.263 53.864,43.755 53.864,48.022 56.159,50.317 56.159,62.255 58.182,64.278 59.579,64.278 61.685,66.384 U9.14@61.685,68.911
MCU_BOOT0: P6.2 U9.1 | length 38.3
  Top Layer w0.254: v1(53.213,76.581) 53.213,81.026 v1(53.34,81.153)
  Bottom Layer w0.254: P6.2@51.308,103.886 51.308,102.91 48.768,100.37 48.768,81.534 49.657,80.645 50.165,81.153 v1(53.34,81.153) ; v1(53.213,76.581) 56.515,76.581 U9.1@57.785,75.311
MCU_CLK: P7.2 R42.1 U9.20 | length 77.6
  Top Layer w0.254: P7.2@35.179,104.648 37.084,106.553 39.37,106.553 43.942,101.981 v1(51.816,101.981) ; v1(54.737,70.358) 54.737,81.915 v1(54.991,82.169)
  Bottom Layer w0.254: R42.1@21.336,103.394 22.368,102.362 32.893,102.362 P7.2@35.179,104.648 ; v1(51.816,101.981) 49.276,99.441 49.276,82.042 49.657,81.661 52.411,81.661 52.919,82.169 53.761,82.169 54.269,81.661 54.483,81.661 v1(54.991,82.169) ; v1(54.737,70.358) 56.338,70.358 U9.20@57.785,68.911
MCU_DIO: P7.3 R43.1 U9.19 | length 74
  Top Layer w0.254: v1(56.007,71.755) 56.007,83.058 56.134,83.185 v1(56.261,83.185)
  Bottom Layer w0.254: R43.1@23.622,103.394 31.385,103.394 P7.3@32.639,104.648 34.163,106.172 40.513,106.172 42.444,104.241 42.444,103.943 48.26,98.127 48.26,81.026 49.657,79.629 51.232,79.629 51.74,80.137 55.499,80.137 56.261,80.899 v1(56.261,83.185) ; v1(56.007,71.755) 57.277,71.755 58.435,70.597 U9.19@58.435,68.911
NetC11_2: C11.2 D6.1 Q3.1 R13.1 | length 10.9
  Bottom Layer w0.254: Q3.1@53.564,28.768 50.82,28.768 D6.1@50.546,29.042 50.546,26.527 R13.1@51.689,25.384 53.689,23.384 C11.2@54.483,23.384